# Altium PCB VSD_I2C.PcbDoc
Units mm, origin at the board's own origin, x right, y up, seen from the top; angles counter-clockwise.
Board outline 97.18 x 104.2 mm, 2 copper layers (Top Layer, Bottom Layer); 24 components, 26 nets, 120 pads, 0 vias.
Unrouted connection lines stored in the file: 13.
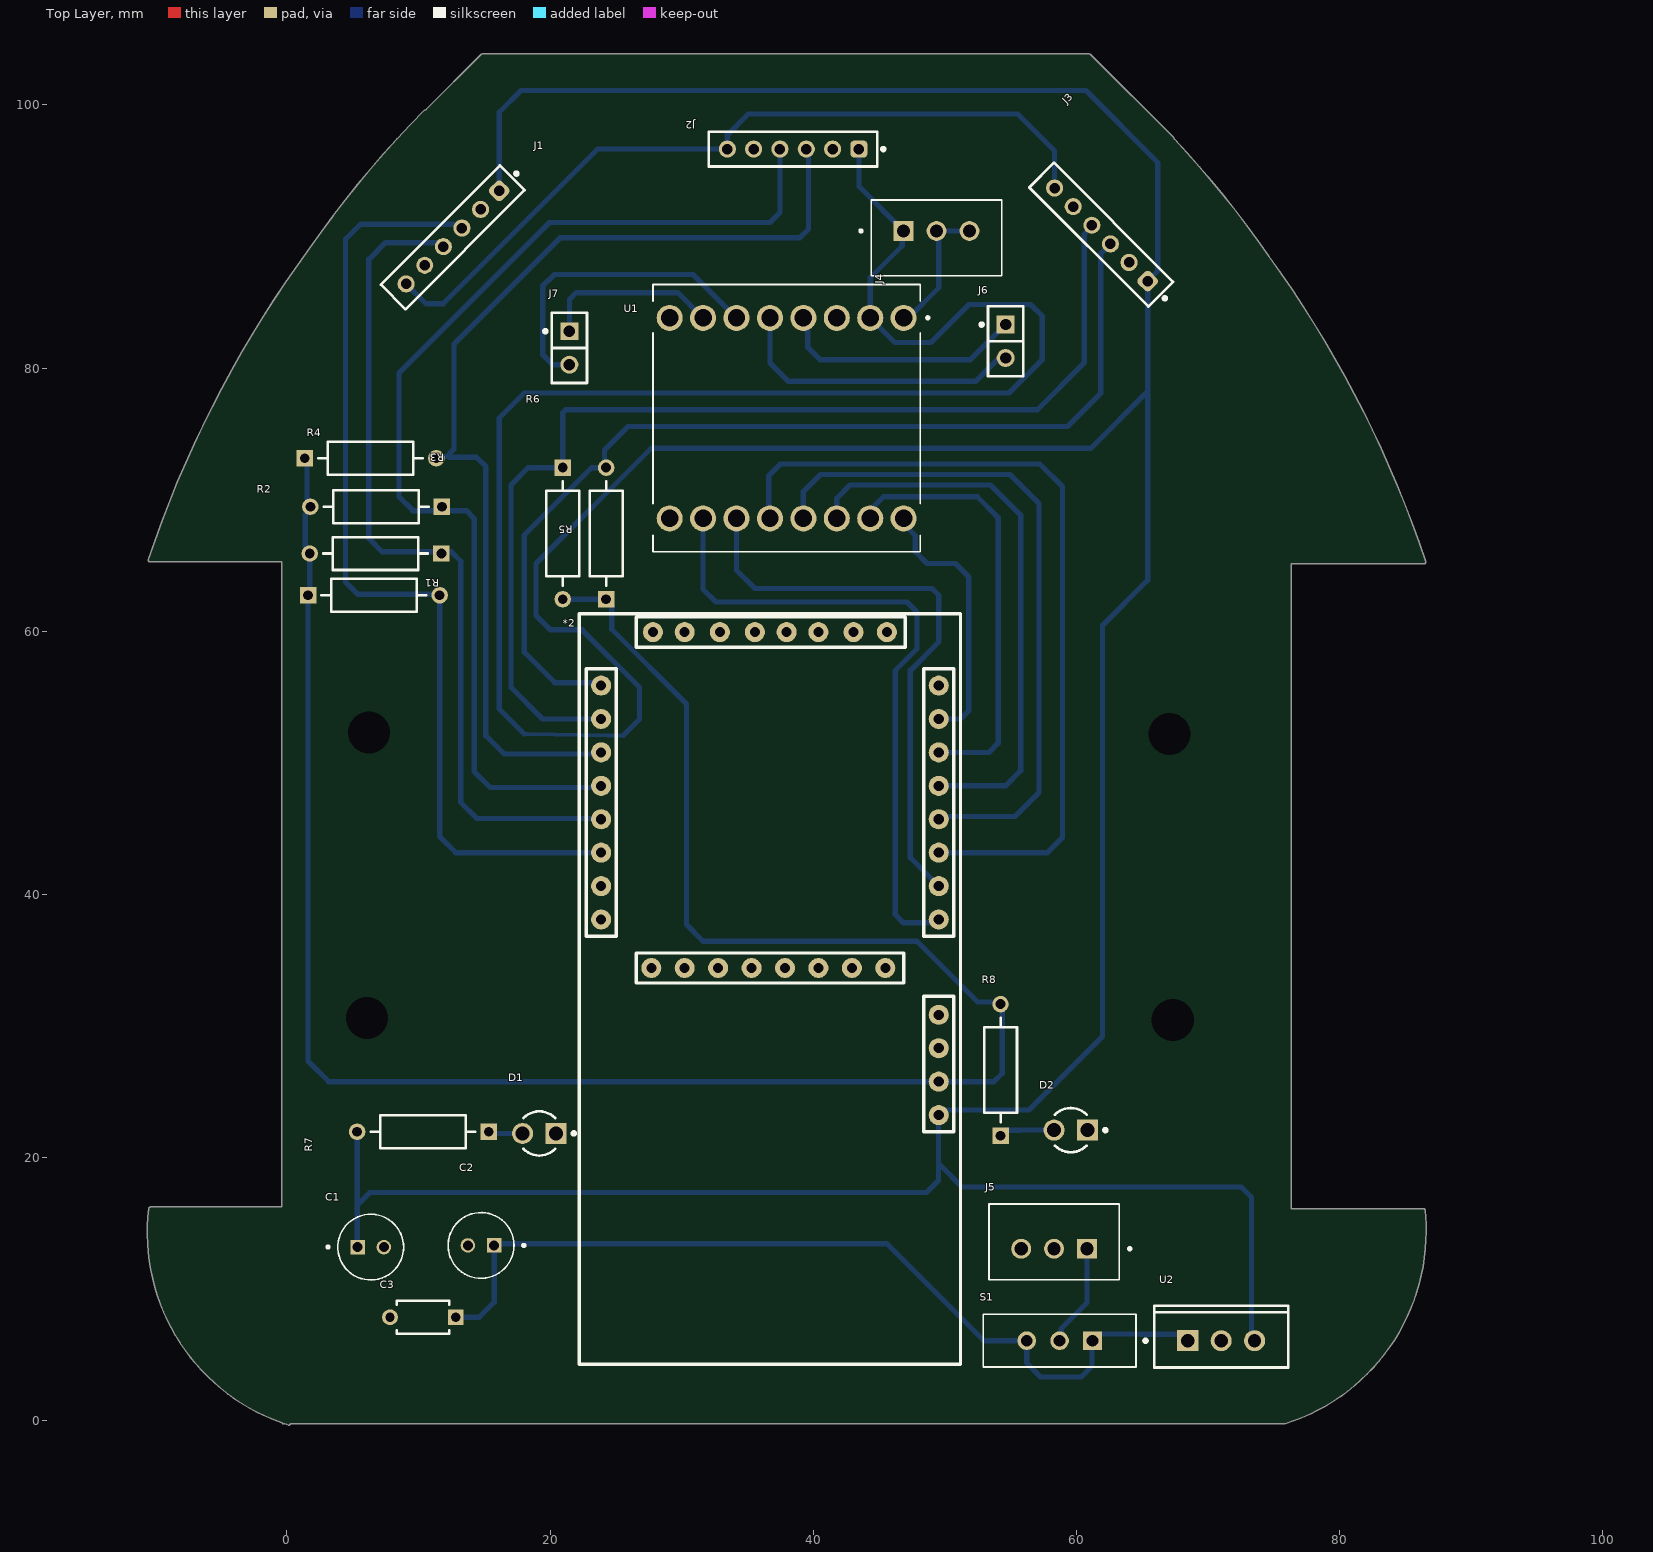
[diagram p0: Top Layer view]
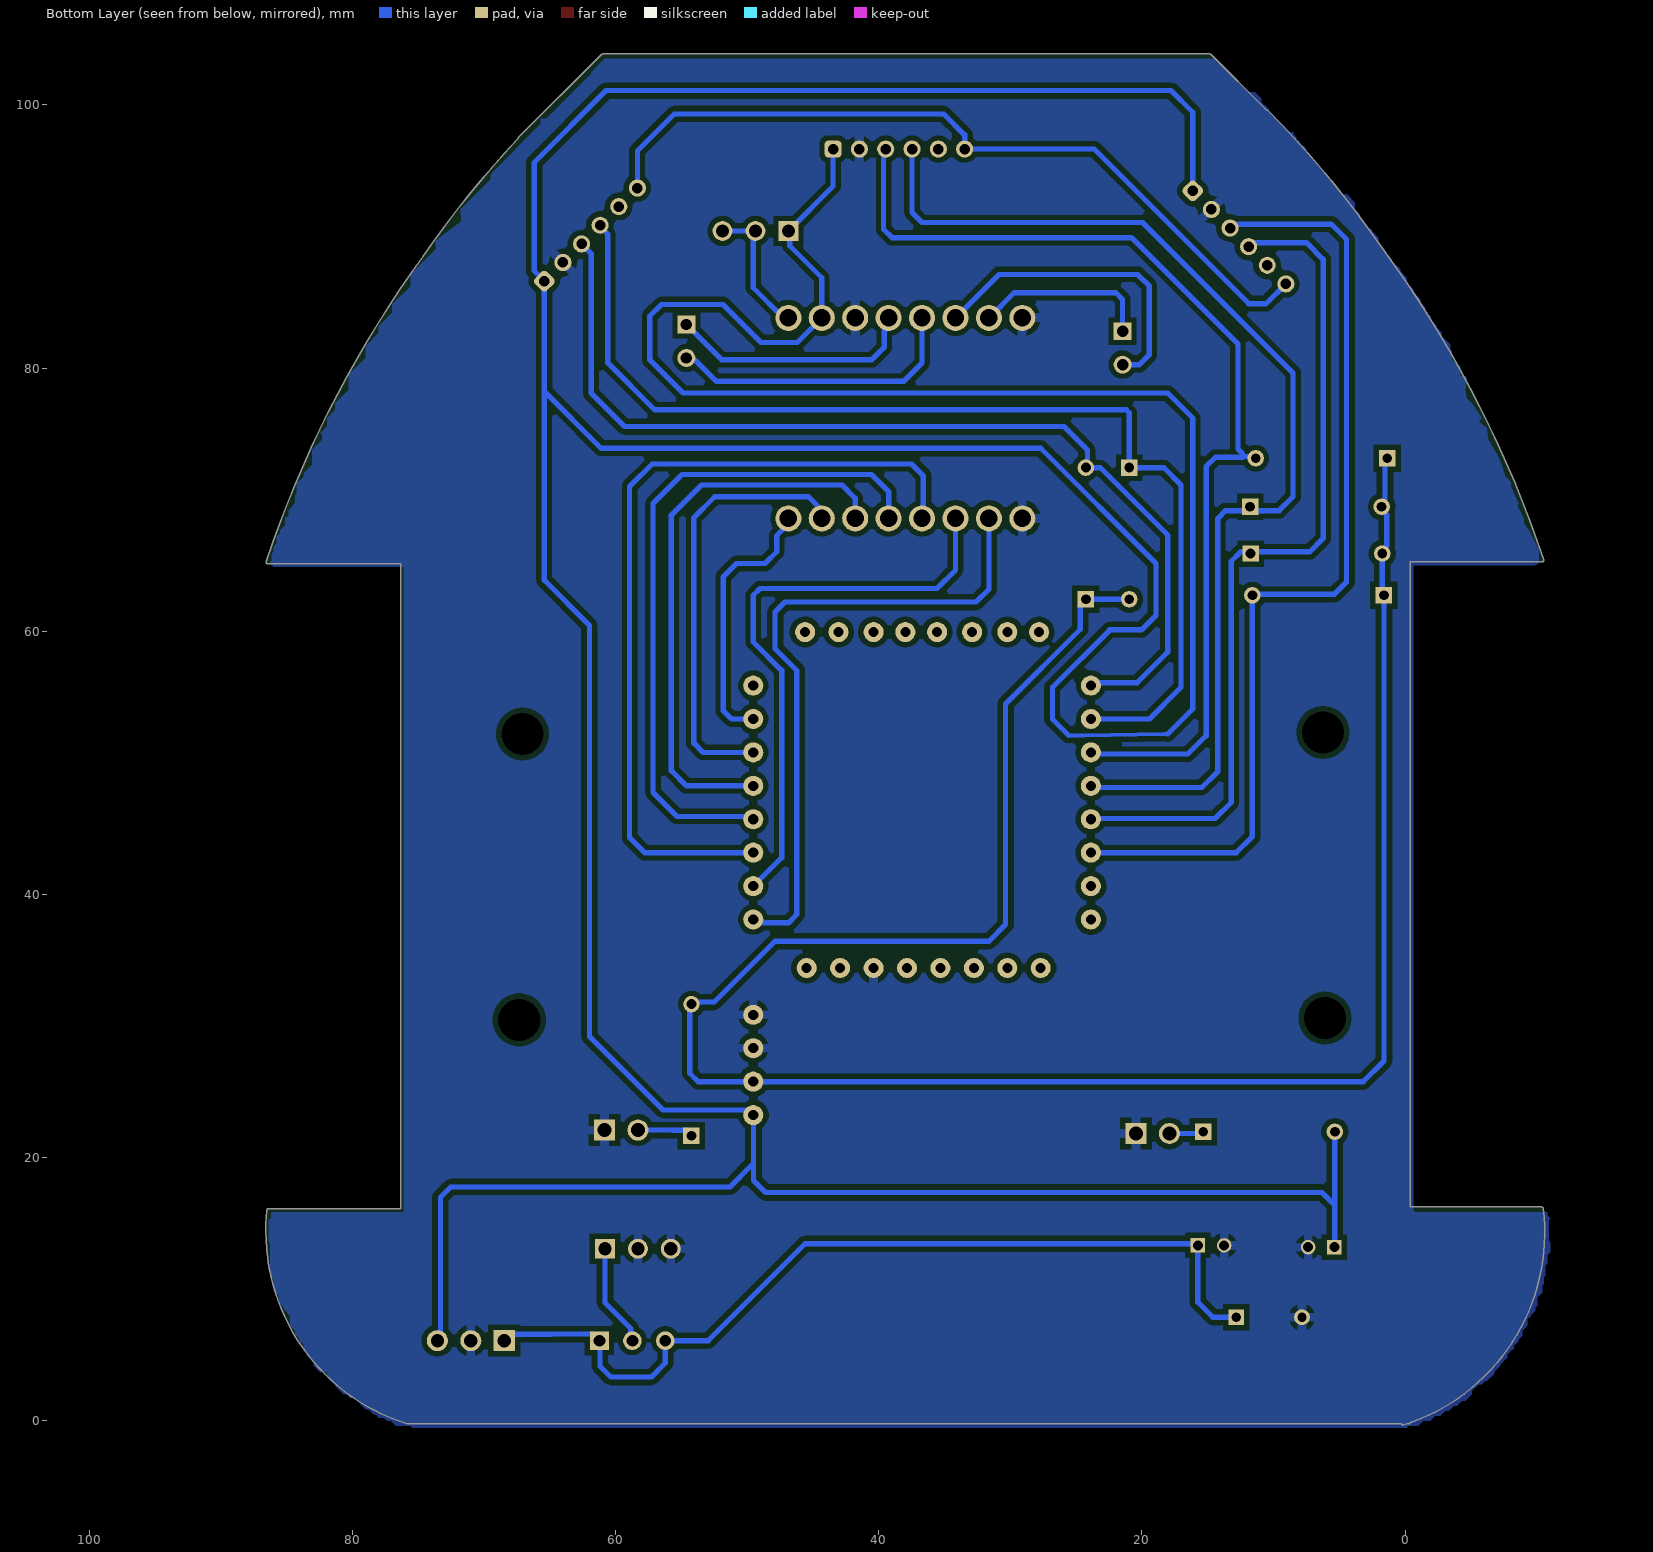
[diagram p1: Bottom Layer view, seen from below]
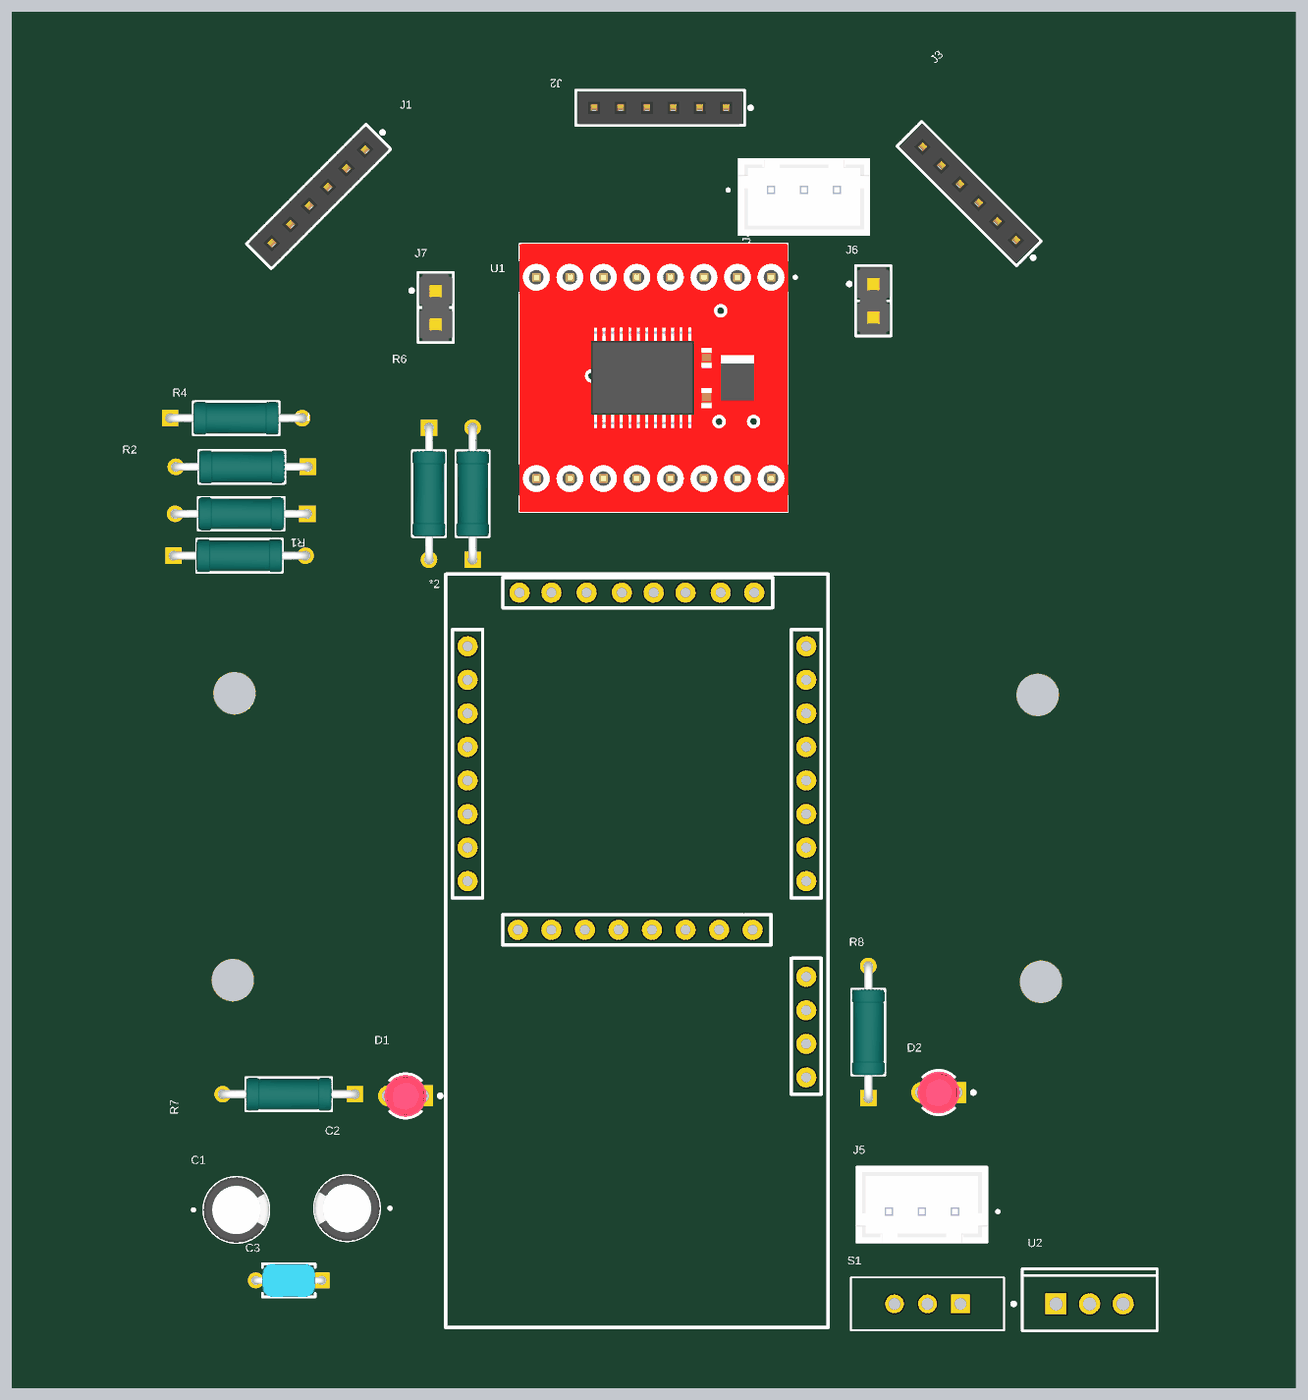
[diagram p2: 3D render of the assembled board from above, using the file's embedded part models]

## Layer stack, top to bottom
Top Solder: solder mask 0.0102, Solder Resist, Dk 3.5
Top Layer: signal copper 0.0356
Dielectric 1: dielectric 0.32, FR-4, Dk 4.8
Bottom Layer: signal copper 0.0356
Bottom Solder: solder mask 0.0102, Solder Resist, Dk 3.5

## Board outline
-0.367,-0.155 ccw(c-0.254,-0.097) -0.254,-0.224 -0.166,-0.224 ccw(c4.719,14.309) 0.1,-0.311 ccw(c0.139,-0.189) 0.261,-0.224 37.719,-0.224 37.846,-0.224 75.819,-0.224 75.857,-0.218 ccw(c71.239,14.399) 86.568,14.399 ccw(c71.24,14.399) 86.482,16.019 ccw(c86.356,16.006) 86.324,16.129 86.319,16.129 76.327,16.129 76.327,65.151 86.358,65.151 ccw(c86.419,65.262) 86.547,65.262 86.54,65.303 ccw(c4.757,37.93) 74.62,88.497 74.604,88.527 ccw(c11.492,44.921) 67.437,97.407 67.4,97.499 61.05,103.849 60.96,103.886 14.859,103.886 14.769,103.849 10.567,99.647 10.459,99.611 ccw(c64.843,45.509) 1.732,89.117 ccw(c71.247,38.074) -10.536,65.446 ccw(c-10.415,65.405) -10.455,65.284 -10.414,65.278 -0.381,65.278 -0.381,16.256 -10.373,16.256 ccw(c-10.373,16.129) -10.5,16.144 ccw(c4.718,14.306)

## Design rules (kind name [scope] priority, off if disabled: settings)
Clearance [All] p1: gap=0.4 ignorepadtopadclearanceinfootprint=FALSE
HoleSize [All] p1: absolutevalues=TRUE maxlimit=3.4 minlimit=0.025 maxpercent=80.000 minpercent=20.000
HoleToHoleClearance [All] p1: gap=0.34 allowstackedmicrovias=TRUE
PlaneConnect [All] p1: planeconnectstyle=Relief reliefexpansion=0.508 reliefentries=4 reliefconductorwidth=0.5 reliefairgap=0.4
PolygonConnect [All] p1: connectstyle=Relief reliefconductorwidth=0.7 reliefentries=4 polygonreliefangle="90 Angle" airgapwidth=0.4
RoutingVias [All] p1: holewidth=0.711 width=1.27 viastyle="Through Hole" minholewidth=0.711 minwidth=1.27 maxholewidth=0.711 maxwidth=1.27
SolderMaskExpansion [All] p1: expansion=0.102 istentingtop=FALSE
SupplyNets "Schematic Supply Nets" [InNet('GND')] p1: voltage=0.000
Width Width_1 [All] p1: maxlimit=0.4 minlimit=0.3 preferedwidth=0.4
27 further rules are at their usual default settings.

## Components (designator, comment, footprint, x,y, rotation, side; value= is the part's Value field where it differs from the comment)
*2 "VSD_FPGA" VSD_FPGA2 8.001,61.722 r270 top
C1 "EEUEB1H2R2S" CAPPRD200W50D500H1100 6.366,13.208 r0 top
C2 "EEUEB1H2R2S" CAPPRD200W50D500H1100 14.748,13.335 r180 top
C3 "RCER72A104K1K1H03B" FP-RCE1K1-2_5-MFG 10.334,7.874 r180 top
D1 "VSLB3940" FP-VSLB3940-MFG 19.177,21.844 r180 top
D2 "VSLB3940" FP-VSLB3940-MFG 59.563,22.098 r180 top
J1 "62000611821" 62000611821 12.593,89.936 r225 top
J2 "62000611821" 62000611821 38.465,96.647 r180 top
J3 "62000611821" 62000611821 61.869,90.15 r135 top
J4 "B3B-XH-A" JST_B3B-XH-A 49.363,89.899 r180 top
J5 "B3B-XH-A" JST_B3B-XH-A 58.293,13.606 r0 top
J6 "SLW-102-01-F-S" FP-SLW-102-01-F-S-MFG 54.61,82.042 r270 top
J7 "SLW-102-01-F-S" FP-SLW-102-01-F-S-MFG 21.463,81.534 r270 top
R1 "4.7K" FP-MRS25-MFG 6.604,62.738 r0 top
R2 "4.7K" FP-MRS25-MFG 6.731,65.913 r180 top
R3 "4.7K" FP-MRS25-MFG 6.35,73.152 r0 top
R4 "4.7K" FP-MRS25-MFG 6.778,69.469 r180 top
R5 "4.7K" FP-MRS25-MFG 24.257,67.437 r90 top
R6 "4.7K" FP-MRS25-MFG 20.955,67.437 r270 top
R7 "MRS25000C1000FRP00" FP-MRS25-MFG 10.334,21.971 r180 top
R8 "220" FP-MRS25-MFG 54.229,26.67 r90 top
S1 "MINI-SPDT-SW" SW_MINI-SPDT-SW 58.714,6.096 r180 top
U1 "ROB-14450" MODULE_ROB-14450 37.973,76.2 r270 top
U2 "LM7805ACT" FAIR-TO-220-3 70.993,6.096 r90 top

## Footprints (in the part's own frame and the unit in brackets; to place one, negate y for a bottom-side part, rotate by r counter-clockwise, add the part's x,y. Pads: shape width x height; smd on the part's side, far side on the other; paste and mask are expansions set on the pad)
62000611821 [mm] "Socket Header, Pitch 2.00 mm, THT, Vertical, single row, 6p"
  rrect50% 1.3x1.3 hole 0.8: 1(-5,0)
  round 1.3 hole 0.8: 2(-3,0) 3(-1,0) 4(1,0) 5(3,0) 6(5,0)
  silkscreen extent -6.97,-1.33 6.4,1.33, body extent -6.25,-1.25 6.25,1.25, height 4.35
CAPPRD200W50D500H1100 [mm]
  round 1.1 hole 0.75: N(1,0)
  rect 1.1x1.1 hole 0.75: P(-1,0)
  silkscreen extent -3.35,-2.5 2.5,2.5, body extent -2.5,-2.5 2.5,2.5, height 11
FAIR-TO-220-3 [mm] "FM, 3-Leads, Body 10.2x4.7mm, Pitch 2.54mm"
  rect 1.6x1.6 hole 1: 1(0,2.54)
  round 1.6 hole 1: 2(0,0) 3(0,-2.54)
  silkscreen extent -2.04,-5.1 2.66,5.87, body extent -2.04,-5.1 2.66,5.1, height 18.95
FP-MRS25-MFG [mm]
  rect 1.25x1.25 hole 0.75 paste-2539.97 mask+0: 1(-5,0)
  round 1.25 hole 0.75 paste-2539.97 mask+0: 2(5,0)
  silkscreen extent -3.98,-1.25 3.98,1.25, body extent -5.72,-1.35 5.72,1.35, height 0.25
FP-RCE1K1-2_5-MFG [mm]
  rect 1.2x1.2 hole 0.7 paste-2539.97 mask+0: 1(-2.5,0)
  round 1.2 hole 0.7 paste-2539.97 mask+0: 2(2.5,0)
  silkscreen extent -2,-1.25 2,1.25, body extent -3.2,-1.35 3.2,1.35, height 0.25
FP-SLW-102-01-F-S-MFG [mm]
  rect 1.36x1.36 hole 0.86 paste-2539.97 mask+0: 1(-1.27,0)
  round 1.36 hole 0.86 paste-2539.97 mask+0: 2(1.27,0)
  silkscreen extent -2.67,-1.95 2.67,1.34, body extent -2.77,-1.44 2.77,1.44, height 0.25
FP-VSLB3940-MFG [mm]
  rect 1.6x1.6 hole 1.05 paste-2539.97 mask+0: 1(-1.27,0)
  round 1.6 hole 1.05 paste-2539.97 mask+0: 2(1.27,0)
  silkscreen extent -2.75,-1.68 1.2,1.68, body extent -2.32,-2.32 2.32,2.32, height 0.25
JST_B3B-XH-A [mm]
  rect 1.508x1.508 / inner round 1.508 / far side rect 1.508x1.508 hole 1: 1(2.5,-0.525)
  round 1.508 hole 1: 2(0,-0.525) 3(-2.5,-0.525)
  silkscreen extent -4.95,-2.87 5.85,2.88, body extent -4.95,-2.88 4.95,2.88, height 7
MODULE_ROB-14450 [mm]
  round 1.98 hole 1.32: 1(-7.62,8.89) 2(-7.62,6.35) 3(-7.62,3.81) 4(-7.62,1.27) 5(-7.62,-1.27) 6(-7.62,-3.81) 7(-7.62,-6.35) 8(-7.62,-8.89) 9(7.62,-8.89) 10(7.62,-6.35) 11(7.62,-3.81) 12(7.62,-1.27) 13(7.62,1.27) 14(7.62,3.81) 15(7.62,6.35) 16(7.62,8.89)
  silkscreen extent -10.16,-10.16 10.16,10.83, body extent -10.16,-10.16 10.16,10.16, height 5.5
SW_MINI-SPDT-SW [mm]
  rect 1.408x1.408 hole 0.9: 1(-2.5,0)
  round 1.408 hole 0.9: 2(0,0) 3(2.5,0)
  silkscreen extent -6.6,-2 5.8,2
VSD_FPGA2 [mil]
  round 60 hole 30: 2(230,625) 3(330,625) 3.3V(1415,1635) 4(430,625) 5V(1515,1635) 6(530,625) 9(630,625) 10(730,625) 11(830,625) 12(930,625) 13(1075,775) 18(1075,875) 19(1075,975) 21(1075,1075) 23(1075,1175) 25(1075,1375) 26(1075,1475) 27(930,1635) 28(830,1635) 31(730,1635) 32(630,1635) 34(530,1635) 35(430,1635) 36(330,1635) 37(230,1635) 38(70,1480) 42(70,1380) 43(70,1275) 44(70,1180) 45(70,1085) 46(70,980) 47(70,875) 48(70,780) GND(1075,1275) GND(1215,1635) GND(1315,1635)
  silkscreen extent 15,560 2260,1700, body extent 18,555 2262,1695, height 20

## Part data
*2: "VSD SQUADROM FM FPGA"
C1 C2: "CAPACITOR, 2.2UF, 50V, 5X11MM; Capacitance:2.2F; Capacitance Tolerance: 20%; Voltage Rating:50V; Life Time @ Temperature:5000 hours @ 105C; Height:11mm; Diameter:5mm; Capacitor Terminals:Radial Leaded; Lead Spacing:2mm; Operating Temperature Range:-40C to +105C; AC Ripple Current:15mA; Capacitor Mounting:Through Hole", Package="RADIAL-2 Panasonic", Availability="No availability data", Check_prices=https://www.snapeda.com/parts/EEUEB1H2R2S/Panasonic/view-part/5793710/?ref=eda, MF=Panasonic, MP=EEUEB1H2R2S, Price=None, SnapEDA_Link=https://www.snapeda.com/parts/EEUEB1H2R2S/Panasonic/view-part/5793710/?ref=snap
C3: library part CMP-06035-011084-1, "Cap Ceramic Monolithic 100nF 100V 10% Thru-Hole Bulk", Capacitance=100nF, Case/Package=Radial, Dielectric=X7R, Max Operating Temperature=125°C, Min Operating Temperature=-55°C, Package Quantity=500, Ratings=AEC-Q200, Resistor Type=Ceramic, Tolerance=10%, Voltage Rating=100V, Height=3.5mm, Height - Seated (Max)=0.138inch, Lead Diameter=0.5mm, Lead Pitch=0.197inch, Lead/Base Style="Formed Leads", Length=0.157inch, Mount="Through Hole", Packaging=Bulk, Termination=Radial, Voltage Rating (DC)=100V, Width=0.098inch
D1 D2: library part CMP-00030-18785862-1, "VSLB3940 940 nm 100 mA ±22° Through Hole High Speed Infrared Emitting Diode - T-1", Case/Package=T, Forward Current=100mA, Forward Voltage=1.35V, Max Operating Temperature=85°C, Max Power Dissipation=160mW, Min Operating Temperature=-25°C, Reverse Voltage=5V, Depth=3.2mm, Fall Time=15ns, Lead Free="Lead Free", Length=3.2mm, Lens Style="Circular, Diffused, Round", Mount="Through Hole", NexarPartId=18785862, Number of Elements=1, Number of LEDs=1, Number of Pins=2, Orientation="Top View", Packaging=Bulk, Peak Wavelength=940nm, Power Dissipation=160mW, Power Rating=160mW, Radiation Hardening=No, REACH SVHC=Unknown, Rise Time=15ns, RoHS=Compliant, Test Current=100mA, Viewing Angle=44°, Wavelength=940nm
J1 J2 J3: library part CMP-03913-65162165-3, "THT Vertical Socket Header WR-PHD, Pitch 2.00 mm, Single Row, 6 pins", Contact Resistance=20mΩ, Current Rating=2A, Operating Supply Voltage=250V, Gender=Female, Lead Pitch=2mm, Number of Pins=6, Orientation=Vertical
J4 J5: "Connector Header Through Hole 3 position 0.098 (2.50mm)", Package=None, Check_prices=https://www.snapeda.com/parts/B3B-XH-A/JST+Sales+America+Inc./view-part/?ref=eda, MF="JST Sales", MP=B3B-XH-A, SnapEDA_Link=https://www.snapeda.com/parts/B3B-XH-A/JST+Sales+America+Inc./view-part/?ref=snap
J6 J7: library part CMP-1023-00122-2, "CONN RCPT 2POS 0.1 GOLD PCB", Max Operating Temperature=125°C, Min Operating Temperature=-55°C, Voltage Rating (AC)=550V, Contact Material=Bronze, Contact Plating=Gold, Gender=Female, Lead Free="Lead Free", Mount="Through Hole", Number of Contacts=2, Number of Rows=1, Orientation=Vertical, Packaging=Bulk, Pitch=2.54mm, Radiation Hardening=No, RoHS Compliant=Yes, Termination=Solder
R1 R2 R3 R4 R5 R6 R7 R8: library part CMP-00030-42757237-1, "MRS25000C1000FRP00 Resistor, 100 Ohm, ± 1%, 600 mW, Axial Leaded, Metal Film (Thin Film), Professional", Case/Package=Axial, Max Operating Temperature=155°C, Max Power Dissipation=600mW, Min Operating Temperature=-55°C, Resistance=100Ω, Temperature Coefficient=50ppm/°C, Tolerance=1%, Voltage Rating=350V, Composition="Metal Film, Thin Film", Contact Plating=Tin, Diameter=2.5mm, Lead Diameter=600µm, Lead Free="Lead Free", Length=6.5mm, Military Standard=Not, Mount="Through Hole", NexarPartId=42757237, Number of Pins=2, Number of Terminations=2, Packaging="Tape & Reel (TR)", Power Rating=600mW, Radiation Hardening=No, REACH SVHC=Unknown, RoHS=Compliant, Schedule B="8533210090, 8533210090", Termination=Axial, Voltage Rating (DC)=350V, Width=2.5mm
S1: "Simple breadboard friendly SPDT slide switch. Rated at 30V/200mA with operating force of 250 +/-100gf.", Package=None, Availability=Unavailable, MP=MINI-SPDT-SW, Price=None
U1: "TB6612FNG Motor Controller/Driver Power Management Evaluation Board", Package=None, Availability="In Stock", Check_prices=https://www.snapeda.com/parts/ROB-14450/SparkFun%20Electronics/view-part/2656367/?ref=eda, MF="SparkFun Electronics", MP=ROB-14450, Price=None, SnapEDA_Link=https://www.snapeda.com/parts/ROB-14450/SparkFun%20Electronics/view-part/2656367/?ref=snap
U2: library part CMP-2000-04937-1, "Positive Voltage Regulator, 5 V, 1 A, 0 to 125 degC, 3-Pin TO-220, RoHS, Tube", Dropout Voltage Measurement Current=1A, Manufacturer=Fairchild, Maximum Input Voltage=35V, Maximum Operating Temperature=+125degC, Minimum Operating Temperature=0degC, Output Voltage=5V, Package Description="3-Pin Through Hole Device, Body 10 x 4.5 mm, Pitch 2.54 mm", Package Reference=TO-220, Quiescent Current=6mA, Typical Dropout Voltage @ Current=2V@1A, Datasheet URL=https://datasheet.ciiva.com/5816/1359194-5816420.pdf, Datasheet Version="Rev. 1.0.1, 05/2006", Dimensions=10.67x4.83x16.51mm, Height=16.51mm, Length=10.67mm, Line Regulation=50mV, Load Regulation=100mV, Manufacturer URL=https://www.fairchildsemi.com/, Maximum Output Current=1A, Mounting Type=ThroughHole, Number of Outputs=1, Output Type=Fixed, Package Type=TO-220, Package URL=https://www.fairchildsemi.com/package-drawings/TO/TO220B03.pdf, Pin Count=3, Polarity=Positive, Regulator Function=Linear, Series=LM78xx, Width=4.83mm

## Free pads (board coordinates)
  round 0.127 on Mech5: 1(-15.981,-5.946) 1(81.794,65.591) 1(100.946,66.013) 1(100.946,66.013)
  round 1.524 hole 3.2: 2(6.096,30.607) 3(6.223,52.324) 4(67.056,52.197) 6(67.31,30.48)

## Nets (pads, with @x,y where several pads share a name; then routed paths per layer and width w, separated by ;. In a path a pad name is that pad's centre, name@x,y a point inside that pad or via, vN(x,y) a via of type N, cw(c..) or ccw(c..) an arc to the next point about the centre after c; other vN are vias at no path point)
"3.3 V": *2.3.3V R1.1 R2.2 R3.1 R4.2 R5.1 R6.2 R8.2 | length 162.2
  Bottom Layer w0.4: R3.1 1.524,72.978 1.524,69.953 1.778,69.699 R4.2 1.778,69.239 1.397,68.858 1.397,66.477 1.731,66.143 R2.2 1.731,62.865 R1.1 1.604,27.352 3.175,25.781 *2.3.3V 53.721,25.781 54.356,26.416 54.356,31.543 54.066,31.833 52.495,31.833 47.879,36.449 31.623,36.449 30.353,37.719 30.353,54.483 24.682,60.154 24.682,62.012 R5.1 R6.2
A01: J6.1 U1.4 | length 18.9
  Bottom Layer w0.4: U1.4 39.545,83.518 39.545,82.831 39.581,82.796 39.581,81.577 40.513,80.645 51.943,80.645 J6.1
A02: J6.2 U1.5 | length 22.7
  Bottom Layer w0.4: U1.5 36.703,80.391 38.1,78.994 52.324,78.994 53.918,80.588 54.426,80.588 J6.2
AIN1: *2.34 U1.14 | length 43
  Bottom Layer w0.4: U1.14 41.783,70.104 42.799,71.12 53.467,71.12 55.753,68.834 55.753,49.403 54.61,48.26 *2.34
AIN2: *2.35 U1.15 | length 33.4
  Bottom Layer w0.4: U1.15 44.625,68.882 44.625,69.517 45.339,70.231 52.451,70.231 54.045,68.637 54.045,51.505 53.34,50.8 *2.35
B01: J7.1 U1.7 | length 13.6
  Bottom Layer w0.4: J7.1 21.463,85.217 21.971,85.725 29.718,85.725 U1.7
B02: J7.2 U1.6 | length 24
  Bottom Layer w0.4: J7.2 20.193,80.264 19.431,81.026 19.431,86.233 20.32,87.122 30.861,87.122 U1.6
BIN1: *2.31 U1.12 | length 63.2
  Bottom Layer w0.4: U1.12 36.605,68.678 36.605,71.811 37.514,72.72 57.201,72.72 58.928,70.993 58.928,44.323 57.785,43.18 *2.31
BIN2: *2.28 U1.11 | length 44
  Bottom Layer w0.4: U1.11 34.163,64.643 35.56,63.246 49.022,63.246 49.53,62.738 49.53,59.194 47.371,57.035 47.371,42.799 *2.28
CE: J1.6 J2.6 J3.6 | length 60.5
  Bottom Layer w0.4: J1.6 10.562,84.897 11.872,84.897 23.622,96.647 J2.6 33.465,97.727 35.052,99.314 55.534,99.314 58.334,96.515 J3.6
GND: *2.GND C1.N C2.N C3.2 D1.1 D2.1 J1.2 J2.2 J3.2 J5.2 J5.3 U1.3 U1.8 U1.9 U2.2
IN: J5.1 S1.2 | length 7.8
  Bottom Layer w0.4: S1.2 58.835,6.217 58.835,7.019 60.793,8.977 J5.1
NetD1_2: D1.2 R7.1 | length 2.6
  Bottom Layer w0.4: R7.1 15.461,21.844 D1.2
NetD2_2: D2.2 R8.1 | length 4.2
  Bottom Layer w0.4: R8.1 54.654,22.095 55.651,22.095 55.654,22.098 D2.2
OUT: C2.P C3.1 S1.1 S1.3 U2.1 | length 67.9
  Bottom Layer w0.4: C3.1@13.295,7.874 14.605,7.874 15.748,9.017 C2.P 15.875,13.462 45.593,13.462 52.959,6.096 S1.3 56.214,4.4 57.274,3.34 60.363,3.34 61.174,4.151 61.174,6.056 61.718,6.6 64.862,6.6 64.878,6.585 67.964,6.585 U2.1
PWMA: *2.36 U1.16 | length 20.5
  Bottom Layer w0.4: U1.16 46.863,68.152 47.74,67.275 47.74,66.052 48.641,65.151 50.8,65.151 51.816,64.135 51.816,53.975 51.181,53.34 *2.36
PWMB: *2.27 U1.10 | length 49.7
  Bottom Layer w0.4: U1.10 31.623,63.202 32.595,62.23 47.117,62.23 47.879,61.468 47.879,58.674 46.228,57.023 46.228,38.481 46.863,37.846 48.734,37.846 48.773,37.885 49.315,37.885 *2.27
"SCL 1": *2.10 J1.3 R1.2 | length 74.6
  Bottom Layer w0.4: R1.2@11.328,62.811 5.388,62.811 4.445,63.754 4.445,89.789 5.588,90.932 12.769,90.932 13.057,90.644 J1.3 ; R1.2@11.368,62.738 R1.2@11.368,62.811 ; R1.2@11.408,62.738 R1.2 11.604,44.404 12.828,43.18 *2.10@24.347,43.18
"SCL 2": *2.4 J2.3 R3.2 | length 79.4
  Bottom Layer w0.4: R3.2 11.477,73.279 12.366,73.279 12.366,73.509 12.7,73.843 12.7,81.824 20.792,89.916 38.989,89.916 39.624,90.551 39.624,96.488 J2.3 ; 12.366,73.225 14.405,73.225 15.113,72.517 15.113,52.07 16.51,50.673 *2.4@23.945,50.673
"SCL 3": *2.2 J3.3 R5.2 | length 76.7
  Bottom Layer w0.4: *2.2 23.661,56.095 20.359,56.095 18.034,58.42 18.034,67.31 23.161,72.437 R5.2 24.13,72.564 24.13,73.787 25.908,75.565 59.309,75.565 61.849,78.105 61.849,88.715 J3.3
"SDA 1": *2.9 J1.4 R2.1 | length 64.9
  Bottom Layer w0.4: J1.4 11.643,89.229 11.337,89.535 7.493,89.535 6.223,88.265 6.223,67.056 7.239,66.04 11.604,66.04 R2.1 11.858,66.04 12.493,66.04 13.208,65.325 13.208,47 14.432,45.777 *2.9@23.933,45.777
"SDA 2": *2.6 J2.4 R4.1 | length 84.4
  Bottom Layer w0.4: *2.6@23.97,48.133 15.448,48.133 14.224,49.357 14.224,68.58 13.633,69.171 12.076,69.171 R4.1 11.48,69.171 9.569,69.171 8.509,70.231 8.509,79.629 19.939,91.059 36.703,91.059 37.465,91.821 J2.4
"SDA 3": *2.3 J3.4 R6.1 | length 83.8
  Bottom Layer w0.4: *2.3 19.431,53.34 17.018,55.753 17.018,71.12 18.335,72.437 R6.1 20.955,76.601 21.189,76.835 57.023,76.835 60.579,80.391 60.579,90.172 61.162,90.756 J3.4
STD: *2.32 U1.13 | length 51.8
  Bottom Layer w0.4: U1.13 39.243,70.612 40.551,71.92 54.953,71.92 57.15,69.723 57.15,47.752 55.333,45.935 49.745,45.935 *2.32
VCC: *2.5V C1.P J1.1 J2.1 J3.1 J4.1 R7.2 U1.2 U2.3 | length 416.1
  Bottom Layer w0.3: 18.034,52.197 18.283,52.197 24.405,52.099 24.407,52.099 ccw(c24.41,52.399) 24.41,52.099 25.576,52.099
  Bottom Layer w0.4: R7.2 5.35,21.955 5.35,16.399 ; C1.P 5.35,13.224 5.35,16.399 ; J1.1 16.129,99.441 17.78,101.092 60.706,101.092 66.167,95.631 66.167,87.376 J3.1 65.405,78.232 ; 18.034,52.197 16.129,54.102 16.129,76.2 18.034,78.105 54.864,78.105 57.404,80.645 57.404,83.947 56.515,84.836 51.816,84.836 48.934,81.954 46.189,81.954 U1.2 44.323,86.868 46.759,89.304 46.759,90.32 J4.1 43.465,93.822 J2.1 ; 25.576,52.099 26.797,53.32 26.797,55.753 22.435,60.115 20.022,60.115 18.923,61.214 18.923,65.151 27.686,73.914 61.087,73.914 65.405,78.232 ; U2.3 73.303,6.326 73.303,16.994 72.517,17.78 51.308,17.78 49.657,19.431 49.514,19.431 ; 5.35,16.399 6.312,17.361 48.603,17.361 49.514,18.272 49.514,19.431 ; 49.514,19.431 49.514,23.225 *2.5V 49.834,23.241 50.215,23.622 56.388,23.622 61.976,29.21 61.976,60.452 65.405,63.881 65.405,78.232
VM: J4.2 J4.3 U1.1 | length 10.1
  Bottom Layer w0.4: U1.1 47.244,83.82 49.53,86.106 J4.2@49.53,90.112 ; J4.2 J4.3
pads on no net: *2.11 *2.12 *2.13 *2.18 *2.19 *2.21 *2.23 *2.25 *2.26 *2.37 *2.38 *2.42 *2.43 *2.44 *2.45 *2.46 *2.47 *2.48 J1.5 J2.5 J3.5

## Polygon pours and split planes (outlines as drawn)
GND on Bottom Layer "GND_L02_P000" (solid, pour order 0): 268 vertices, not listed, extent -11.049,-0.508 86.487,103.505

## Silkscreen, mask and mechanical layers (free items; w line width, h text height)
Mechanical 1:
  lines w0.254: -10.415,65.405 cw(c71.247,38.074) 1.836,89.043 cw(c64.843,45.509) 10.549,99.521 ; -10.373,16.129 ccw(c4.718,14.306) 0.139,-0.189 ; 67.221,97.452 cw(c11.492,44.921) 74.499,88.455 ; 74.168,88.9 cw(c4.757,37.93) 86.419,65.262 ; 75.819,-0.097 ccw(c71.239,14.399) 86.356,16.006
  lines w0.4: -0.254,-0.097 37.719,-0.097 ; -0.254,16.129 -0.254,65.405 ; 10.477,99.377 14.859,103.759 38.608,103.759 60.96,103.759 61.087,103.632 67.31,97.409 ; 37.846,-0.097 75.819,-0.097 ; 86.319,16.002 76.2,16.002 76.2,65.278 86.36,65.278 ; -0.381,16.256 -0.381,65.278 ; -0.381,16.256 -0.381,65.278 ; -0.381,16.256 -0.381,65.278 ; -0.254,-0.224 -0.166,-0.224 ; -0.254,-0.224 -0.166,-0.224 ; -0.254,-0.224 -0.166,-0.224 ; 0.261,-0.224 37.719,-0.224 ; 0.261,-0.224 37.719,-0.224 ; 0.261,-0.224 37.719,-0.224 ; 10.459,99.611 10.567,99.647 ; 10.459,99.611 10.567,99.647 ; 10.459,99.611 10.567,99.647 ; 10.567,99.647 14.769,103.849 ; 10.567,99.647 14.769,103.849 ; 10.567,99.647 14.769,103.849 ; 14.732,103.759 14.769,103.849 ; 14.732,103.759 14.769,103.849 ; 14.732,103.759 14.769,103.849 ; 14.732,103.759 60.833,103.759 ; 14.732,103.759 60.96,103.886 14.732,103.759 ; 37.719,-0.224 37.846,-0.224 ; 37.719,-0.224 37.846,-0.224 ; 37.719,-0.224 37.846,-0.224 ; 37.846,-0.224 75.819,-0.224 ; 37.846,-0.224 75.819,-0.224 ; 37.846,-0.224 75.819,-0.224 ; 60.833,103.759 61.05,103.849 ; 60.833,103.759 61.05,103.849 ; 60.833,103.759 61.05,103.849 ; 61.05,103.849 67.4,97.499 ; 61.05,103.849 67.4,97.499 ; 61.05,103.849 67.4,97.499 ; 67.4,97.499 67.437,97.407 ; 67.4,97.499 67.437,97.407 ; 67.4,97.499 67.437,97.407 ; 74.604,88.527 74.62,88.497 ; 74.604,88.527 74.62,88.497 ; 74.604,88.527 74.62,88.497 ; 75.819,-0.224 75.857,-0.218 ; 75.819,-0.224 75.857,-0.218 ; 75.819,-0.224 75.857,-0.218 ; 76.327,16.129 86.319,16.129 ; 76.327,16.129 86.319,16.129 ; 76.327,16.129 76.327,65.151 ; 76.327,16.129 86.319,16.129 ; 76.327,16.129 76.327,65.151 ; 76.327,16.129 76.327,65.151 ; 76.327,65.151 86.358,65.151 ; 76.327,65.151 86.358,65.151 ; 76.327,65.151 86.358,65.151 ; 86.319,16.129 86.324,16.129 ; 86.319,16.129 86.324,16.129 ; 86.319,16.129 86.324,16.129 ; 86.54,65.303 86.547,65.262 ; 86.54,65.303 86.547,65.262 ; 86.54,65.303 86.547,65.262
  lines w0.508: -10.536,65.446 cw(c71.247,38.074) 1.732,89.117 ; -10.536,65.446 ccw(c-10.415,65.405) -10.455,65.284 ; -10.536,65.446 cw(c71.247,38.074) 1.732,89.117 ; -10.536,65.446 ccw(c-10.415,65.405) -10.455,65.284 ; -10.536,65.446 cw(c71.247,38.074) 1.732,89.117 ; -10.536,65.446 ccw(c-10.415,65.405) -10.455,65.284 ; -10.5,16.144 cw(c-10.373,16.129) -10.373,16.256 ; -10.5,16.144 ccw(c4.718,14.306) -0.367,-0.155 ; -10.5,16.144 cw(c-10.373,16.129) -10.373,16.256 ; -10.5,16.144 ccw(c4.718,14.306) -0.367,-0.155 ; -10.5,16.144 cw(c-10.373,16.129) -10.373,16.256 ; -10.5,16.144 ccw(c4.718,14.306) -0.367,-0.155 ; -0.367,-0.155 ccw(c-0.254,-0.097) -0.254,-0.224 cw(c-0.254,-0.097) -0.367,-0.155 ; -0.166,-0.224 ccw(c4.719,14.309) 0.1,-0.311 ; -0.166,-0.224 ccw(c4.719,14.309) 0.1,-0.311 ; -0.166,-0.224 ccw(c4.719,14.309) 0.1,-0.311 ; 0.1,-0.311 ccw(c0.139,-0.189) 0.261,-0.224 cw(c0.139,-0.189) 0.1,-0.311 ; 1.732,89.117 cw(c64.843,45.509) 10.459,99.611 ; 1.732,89.117 cw(c64.843,45.509) 10.459,99.611 ; 1.732,89.117 cw(c64.843,45.509) 10.459,99.611 ; 67.437,97.407 cw(c11.492,44.921) 74.604,88.527 ; 67.437,97.407 cw(c11.492,44.921) 74.604,88.527 ; 67.437,97.407 cw(c11.492,44.921) 74.604,88.527 ; 74.62,88.497 cw(c4.757,37.93) 86.54,65.303 ; 74.62,88.497 cw(c4.757,37.93) 86.54,65.303 ; 74.62,88.497 cw(c4.757,37.93) 86.54,65.303 ; 75.857,-0.218 ccw(c71.239,14.399) 86.568,14.399 ; 75.857,-0.218 ccw(c71.239,14.399) 86.568,14.399 ; 75.857,-0.218 ccw(c71.239,14.399) 86.568,14.399 ; 86.324,16.129 cw(c86.356,16.006) 86.482,16.019 ; 86.324,16.129 cw(c86.356,16.006) 86.482,16.019 ; 86.324,16.129 cw(c86.356,16.006) 86.482,16.019 ; 86.358,65.151 ccw(c86.419,65.262) 86.547,65.262 ; 86.358,65.151 ccw(c86.419,65.262) 86.547,65.262 ; 86.358,65.151 ccw(c86.419,65.262) 86.547,65.262 ; 86.482,16.019 cw(c71.24,14.399) 86.568,14.399 ; 86.482,16.019 cw(c71.24,14.399) 86.568,14.399 ; 86.482,16.019 cw(c71.24,14.399) 86.568,14.399
  lines w0.6: -10.414,65.405 -0.254,65.405 ; -10.373,16.129 -0.254,16.129 ; -10.455,65.284 -10.414,65.278 ; -10.455,65.284 -10.414,65.278 ; -10.455,65.284 -10.414,65.278 ; -10.414,65.278 -0.381,65.278 ; -10.414,65.278 -0.381,65.278 ; -10.414,65.278 -0.381,65.278 ; -10.373,16.256 -0.381,16.256 ; -10.373,16.256 -0.381,16.256 ; -10.373,16.256 -0.381,16.256
Mechanical 17:
  circle w0.013: c30.805,32.507 r0.381
  circle w0.013: c35.885,32.507 r0.381
  circle w0.013: c33.345,32.507 r0.381
  circle w0.013: c28.265,32.507 r0.381
  circle w0.013: c38.425,32.507 r0.381
  circle w0.013: c40.965,32.507 r0.381
  circle w0.013: c43.505,32.507 r0.381
  circle w0.013: c46.045,32.507 r0.381
  circle w0.013: c49.982,41.27 r0.381
  circle w0.013: c49.982,51.43 r0.381
  circle w0.013: c49.982,38.73 r0.381
  circle w0.013: c49.982,43.81 r0.381
  circle w0.013: c49.982,46.35 r0.381
  circle w0.013: c49.982,48.89 r0.381
  circle w0.013: c49.982,36.19 r0.381
  circle w0.013: c49.982,53.97 r0.381
  circle w0.013: c24.328,26.411 r0.381
  circle w0.013: c24.328,23.871 r0.381
  circle w0.013: c24.328,28.951 r0.381
  circle w0.013: c24.328,21.331 r0.381
  circle w0.013: c24.328,53.97 r0.381
  circle w0.013: c24.328,43.81 r0.381
  circle w0.013: c24.328,46.35 r0.381
  circle w0.013: c24.328,36.19 r0.381
  circle w0.013: c24.328,51.43 r0.381
  circle w0.013: c24.328,48.89 r0.381
  circle w0.013: c24.328,41.27 r0.381
  circle w0.013: c24.328,38.73 r0.381
  circle w0.013: c28.265,58.034 r0.381
  circle w0.013: c30.805,58.034 r0.381
  circle w0.013: c33.345,58.034 r0.381
  circle w0.013: c35.885,58.034 r0.381
  circle w0.013: c38.425,58.034 r0.381
  circle w0.013: c40.965,58.034 r0.381
  circle w0.013: c43.505,58.034 r0.381
  circle w0.013: c46.045,58.034 r0.381
  circle w0.013: c68.245,15.997 r0.375
  circle w0.013: c66.245,15.997 r0.375
  circle w0.013: c77.906,15.997 r0.375
  circle w0.013: c75.906,15.997 r0.375
  circle w0.013: c59.177,15.997 r0.525
  circle w0.013: c56.637,15.997 r0.525
  circle w0.013: c77.213,-0.774 r0.5
  circle w0.013: c74.714,-0.817 r0.5
  circle w0.013: c72.214,-0.861 r0.5
  circle w0.013: c54.117,90.36 r0.525
  circle w0.013: c56.617,90.36 r0.525
  circle w0.013: c18.588,81.938 r0.535
  circle w0.013: c18.588,79.398 r0.535
  circle w0.013: c18.588,76.858 r0.535
  circle w0.013: c18.588,74.318 r0.535
  circle w0.013: c18.588,71.778 r0.535
  circle w0.013: c18.588,69.238 r0.535
  circle w0.013: c56.891,81.938 r0.535
  circle w0.013: c56.891,79.398 r0.535
  circle w0.013: c56.891,76.858 r0.535
  circle w0.013: c56.891,74.318 r0.535
  circle w0.013: c56.891,71.778 r0.535
  circle w0.013: c56.891,69.238 r0.535
  circle w0.013: c57.323,62.759 r0.535
  circle w0.013: c59.863,62.759 r0.535
  circle w0.013: c62.403,62.759 r0.535
  circle w0.013: c64.943,62.759 r0.535
  circle w0.013: c67.483,62.759 r0.535
  circle w0.013: c70.023,62.759 r0.535
  circle w0.013: c-19.365,9.321 r0.535
  circle w0.013: c-18.373,6.983 r0.535
  circle w0.013: c-17.38,4.645 r0.535
  circle w0.013: c-16.388,2.307 r0.535
  circle w0.013: c56.92,8.383 r0.375
  circle w0.013: c66.92,8.383 r0.375
  circle w0.013: c77.313,8.377 r0.5
  circle w0.013: c74.773,8.377 r0.5
  circle w0.013: c72.233,8.377 r0.5
  circle w0.013: c28.827,68.042 r0.66
  circle w0.013: c31.367,68.042 r0.66
  circle w0.013: c33.907,68.042 r0.66
  circle w0.013: c36.447,68.042 r0.66
  circle w0.013: c38.987,68.042 r0.66
  circle w0.013: c41.527,68.042 r0.66
  circle w0.013: c44.067,68.042 r0.66
  circle w0.013: c46.607,68.042 r0.66
  circle w0.013: c46.607,83.282 r0.66
  circle w0.013: c44.067,83.282 r0.66
  circle w0.013: c41.527,83.282 r0.66
  circle w0.013: c38.987,83.282 r0.66
  circle w0.013: c36.447,83.282 r0.66
  circle w0.013: c33.907,83.282 r0.66
  circle w0.013: c31.367,83.282 r0.66
  circle w0.013: c28.827,83.282 r0.66
  circle w0.013: c41.905,97.023 r0.51
  circle w0.013: c34.285,97.023 r0.51
  circle w0.013: c36.825,97.023 r0.51
  circle w0.013: c39.365,97.023 r0.51
  circle w0.013: c6.225,85.055 r0.51
  circle w0.013: c1.639,78.969 r0.51
  circle w0.013: c3.168,80.998 r0.51
  circle w0.013: c4.696,83.026 r0.51
  circle w0.013: c73.021,78.84 r0.51
  circle w0.013: c68.65,85.082 r0.51
  circle w0.013: c70.107,83.002 r0.51
  circle w0.013: c71.564,80.921 r0.51
  circle w0.013: c92.131,8.169 r0.45
  circle w0.013: c89.784,3.755 r0.45
  circle w0.013: c90.958,5.962 r0.45
  circle w0.013: c-7.503,0.241 r0.525
  circle w0.013: c-5.003,0.241 r0.525
  circle w0.013: c47.335,91.131 r0.52
  circle w0.013: c44.795,91.131 r0.52
  circle w0.013: c42.255,91.131 r0.52
  circle w0.013: c39.715,91.131 r0.52
  circle w0.013: c37.175,91.131 r0.52
  circle w0.013: c34.635,91.131 r0.52
  circle w0.013: c32.095,91.131 r0.52
  circle w0.013: c29.555,91.131 r0.52
  circle w0.013: c84.521,6.212 r0.35
  circle w0.013: c87.021,10.543 r0.35
  circle w0.013: c3.094,32.761 r1.6
  circle w0.013: c71.42,50.745 r1.6
  circle w0.013: c71.42,32.761 r1.6
  circle w0.013: c3.094,50.745 r1.65
Mechanical 18:
  circle w0.013: c47.925,21.382 r0.254

## Dimensions
-0.635,65.024 to 6.223,52.324 on Bottom Layer